# Altium PCB DUTBoard_NO_CAPS_2.PcbDoc (part 4 of 5)
Units mil, origin at the board's own origin, x right, y up, seen from the top; angles counter-clockwise.
Board outline 5475 x 5475 mil, 4 copper layers (Top Layer, Mid-Layer 1, Mid-Layer 2, Bottom Layer); 57 components, 471 nets, 1641 pads, 1025 vias.
Unrouted connection lines stored in the file: 1.
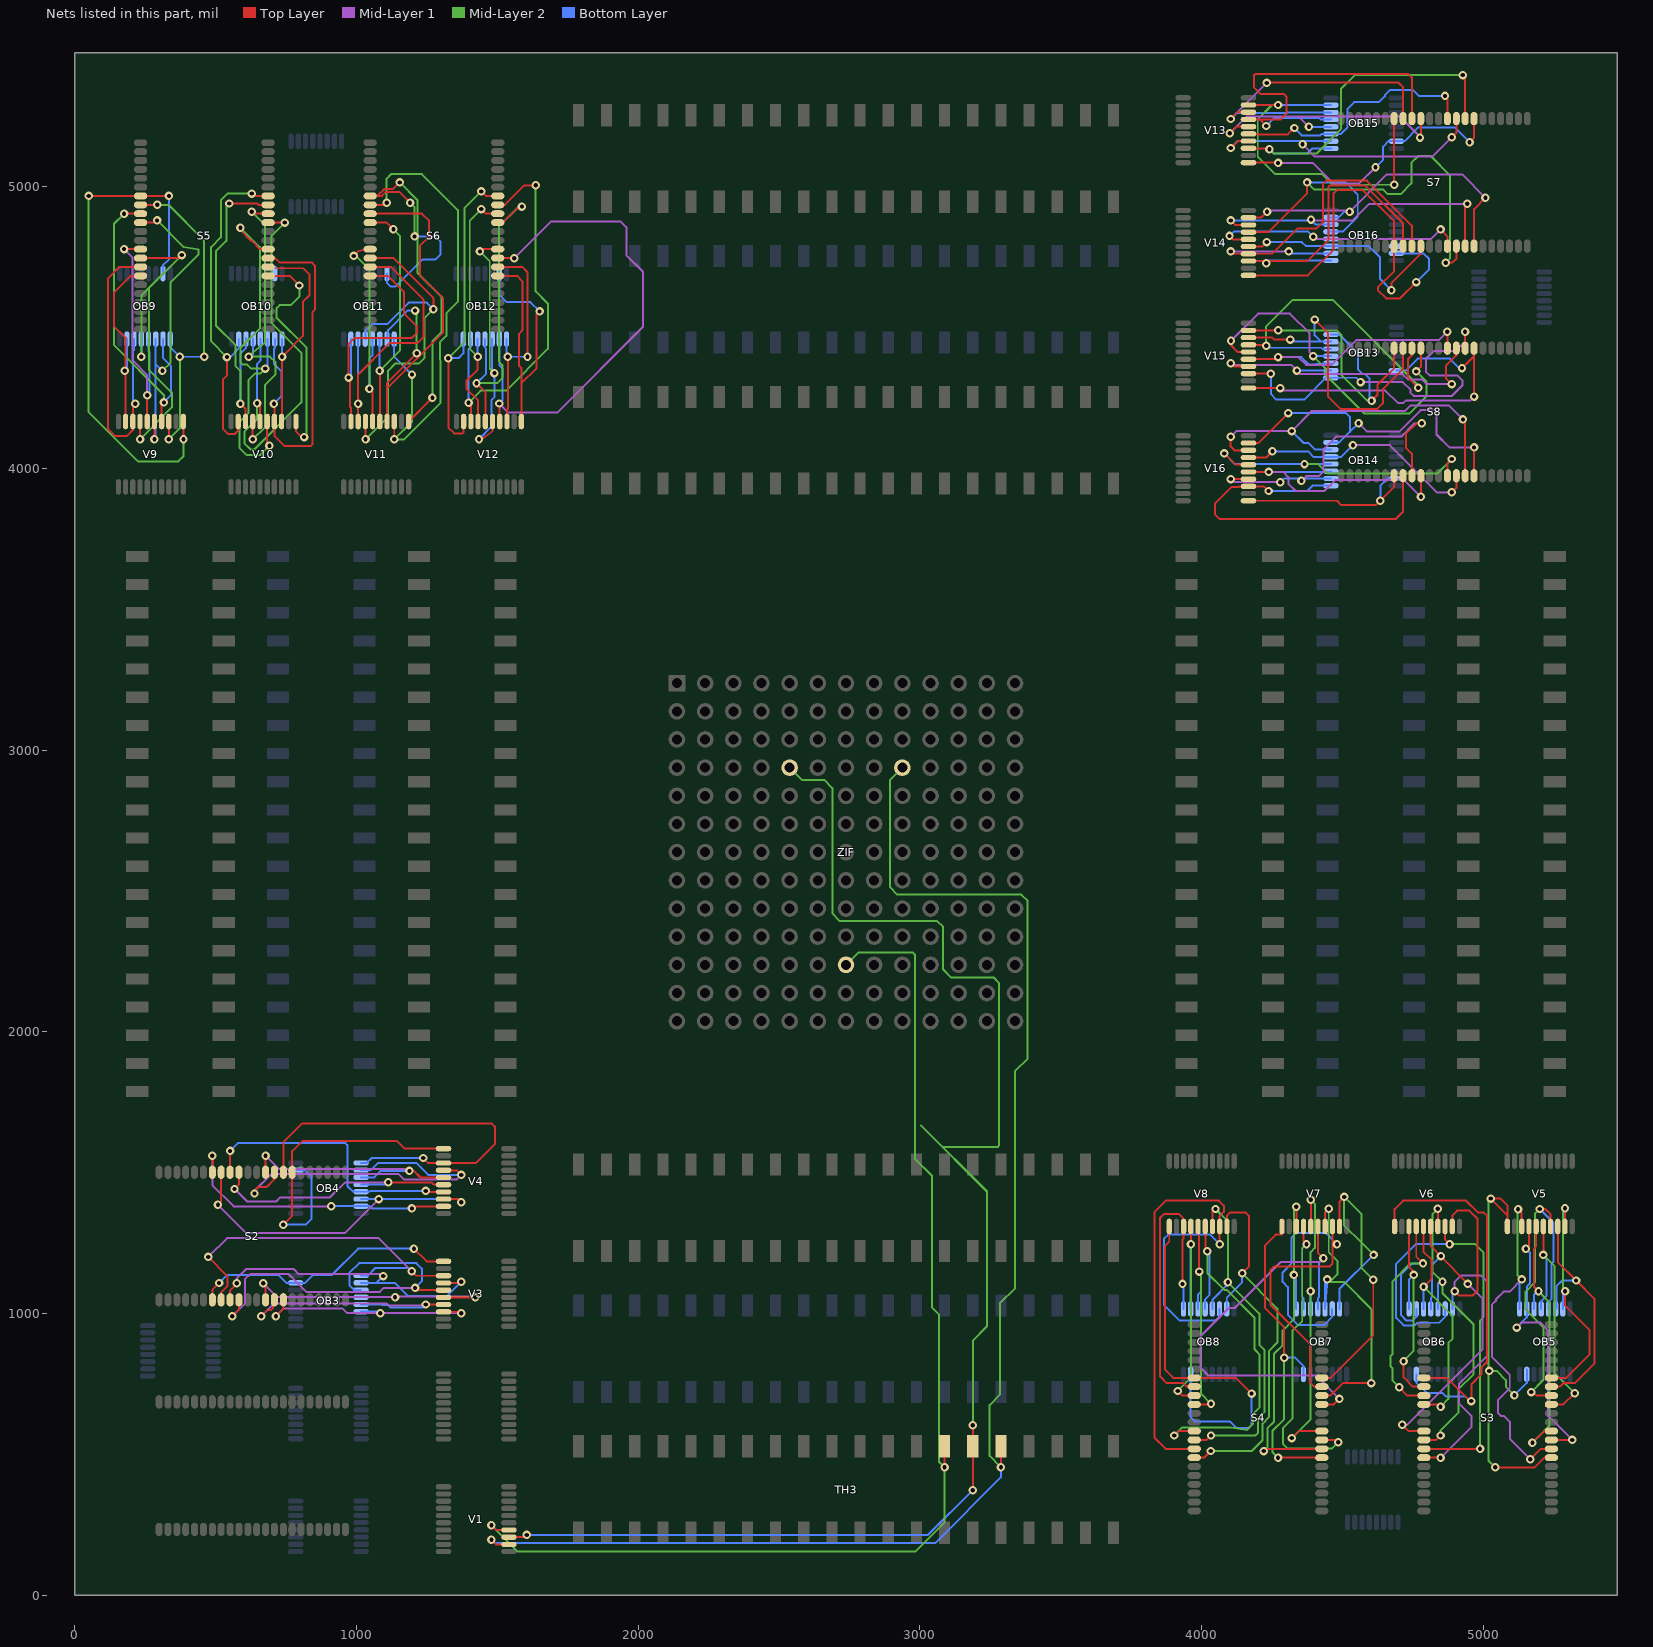
[diagram p6: the nets of this part, all layers, seen from the top]

## Via types
v1: diameter 30, hole 15, Top Layer to Bottom Layer, 1025 vias

## Nets (pads, with @x,y where several pads share a name; then routed paths per layer and width w, separated by ;. In a path a pad name is that pad's centre, name@x,y a point inside that pad or via, vN(x,y) a via of type N, cw(c..) or ccw(c..) an arc to the next point about the centre after c; other vN are vias at no path point) (continued)
INSIDE_B125: TH3.27@3087.5,528.54 V1.IVCC5 ZIF.126 | length 4157.8
  Top Layer w7: v1(1479,248) 1495.39,231.61 V1.IVCC5@1541.14,231.61 ; v1(3087.5,454.17) TH3.27@3087.5,528.54
  Mid-Layer 2 w7: v1(1479,248) 1571,156 2985,156 3087.5,258.5 v1(3087.5,454.17) 3067,474.67 3067,997 3043,1021 3043,1488 2982,1549 2982,2274 2974,2282 2782,2282 ZIF.126@2737.5,2237.5
INSIDE_B126: TH3.26@3187.5,528.54 V1.IVCC6 ZIF.127 | length 5316.4
  Top Layer w7: V1.IVCC6@1541.14,206.02 1596.02,206.02 v1(1604,214) ; v1(3187.5,373) TH3.26@3187.5,528.54 v1(3187.5,603)
  Mid-Layer 2 w7: ZIF.127@2537.5,2937.5 2581,2894 2660,2894 2689,2865 2689,2420 2716,2393 3061,2393 3082,2372 3082,2221 3110,2193 3261,2193 3281,2173 3281,1596.5 3275.5,1591 3080,1591 ; 3004,1667 3238,1433 3238,954 3187.5,903.5 v1(3187.5,603)
  Bottom Layer w7: v1(1604,214) 3028.5,214 v1(3187.5,373)
INSIDE_B127: TH3.25@3287.5,528.54 V1.IVCC7 ZIF.128 | length 5124
  Top Layer w7: v1(1479,197) 1495.57,180.43 V1.IVCC7@1541.14,180.43 ; v1(3287.5,454.17) TH3.25@3287.5,528.54
  Mid-Layer 2 w7: ZIF.128@2937.5,2937.5 2893,2893 2893,2514 2920,2487 3360,2487 3382,2465 3382,1905 3338,1861 3338,1090 3284,1036 3284,711.56 3247,674.56 3247,494.67 v1(3287.5,454.17)
  Bottom Layer w7: v1(1479,197) 1491,185 3054,185 3287.5,418.5 v1(3287.5,454.17)
NetOB1_U_OB_WRP16_DS: OB16.DS
OB_D_B0: OB16.D0 S7.DATA0 V14.OVL0 | length 1471.6
  Top Layer w7: V14.OVL0@4166.14,4684.84 4376.84,4684.84 4468,4776 4468,4976.5 4479,4987.5 4572.22,4987.5 4683.27,4876.45 S7.DATA0@4683.27,4788.62 4683.27,4699.6 4625.57,4641.9 4625.57,4632 4654.57,4603 4704,4603 v1(4762,4661)
  Bottom Layer w7: OB16.D0@4691.14,4763.02 4786.98,4763.02 4807,4743 4807,4706 v1(4762,4661)
OB_D_B1: OB16.D1 S7.DATA1 V14.OVL1 | length 1149.3
  Top Layer w7: V14.OVL1@4166.14,4736.02 v1@4229.5,4736.02 ; v1(4229.5,4727.5) v1@4229.5,4736.02 ; S7.DATA1@4714.76,4788.62 4714.76,4869 4579.26,5004.5 4455,5004.5 4450,4999.5 4450,4810 4376.02,4736.02 v1@4229.5,4736.02
  Bottom Layer w7: v1(4229.5,4727.5) 4239.43,4737.43 OB16.D1@4458.86,4737.43
OB_D_B2: OB16.D2 S7.DATA2 V14.OVL2 | length 1330.8
  Top Layer w7: v1(4103,4770) 4111.39,4761.61 V14.OVL2@4166.14,4761.61 4250.61,4761.61 4340,4851 4406,4851 4430.71,4875.71 4430.71,5009.5 4442.71,5021.5 4586.5,5021.5 4746.26,4861.74 S7.DATA2@4746.26,4788.62
  Mid-Layer 1 w7: v1(4103,4770) v1(4309,4770)
  Bottom Layer w7: v1(4309,4770) 4315.98,4763.02 OB16.D2@4458.86,4763.02
OB_D_B3: OB16.D3 S7.DATA3 V14.OVL3 | length 828.9
  Top Layer w7: V14.OVL3@4166.14,4787.2 4215,4787.2 v1(4231,4803.2) ; v1(4673.4,4632.15) 4673.4,4657.15 4777.76,4761.5 S7.DATA3@4777.76,4788.62
  Bottom Layer w7: v1(4231,4803.2) 4355.8,4803.2 4370.39,4788.61 OB16.D3@4458.86,4788.61 4592.9,4788.61 4633,4748.51 4633,4672.55 v1(4673.4,4632.15)
OB_D_B4: OB16.D4 S7.DATA4 V14.OVL4 | length 988.6
  Top Layer w7: v1(4098.77,4825) 4110.97,4812.8 V14.OVL4@4166.14,4812.8 ; v1(4848,4848) 4872.24,4823.76 S7.DATA4@4872.24,4788.62
  Mid-Layer 1 w7: v1(4396,4822.2) 4404,4814.2 4814.2,4814.2 v1(4848,4848)
  Bottom Layer w7: v1(4098.77,4825) 4114.27,4840.5 4377.7,4840.5 v1(4396,4822.2) 4404,4814.2 OB16.D4@4458.86,4814.2
OB_D_B5: OB16.D5 S7.DATA5 V14.OVL5 | length 1754.7
  Top Layer w7: V14.OVL5@4166.14,4838.39 4236.02,4838.39 4374,4976.37 v1(4374,5015) ; v1(4866,4730) 4890,4730 4903.74,4743.74 S7.DATA5@4903.74,4788.62
  Mid-Layer 2 w7: v1(4374,5015) 4400,4989 4644.57,4989 4660.27,4973.31 4706,4973.31 4744.07,5011.37 4744.07,5084.63 4768,5108.57 4812.43,5108.57 4882,5039 4882,4746 v1(4866,4730)
  Bottom Layer w7: v1(4374,5015) 4510.67,5015 4554,4971.67 4554,4892.5 4501.3,4839.8 OB16.D5@4458.86,4839.8
OB_D_B6: OB16.D6 S7.DATA6 V14.OVL6 | length 1169
  Top Layer w7: v1(4103,4880) 4119.02,4863.98 V14.OVL6@4166.14,4863.98 ; S7.DATA6@4935.24,4788.62 4935.24,4931.24 v1(4943,4939)
  Mid-Layer 1 w7: v1(4388,4883) 4392,4879 4535.21,4879 4595.21,4939 v1(4943,4939)
  Bottom Layer w7: v1(4103,4880) v1@4388,4880 ; v1(4388,4883) v1@4388,4880 ; OB16.D6@4458.86,4865.39 4405.61,4865.39 v1@4388,4880
OB_D_B7: OB16.D7 S7.DATA7 V14.OVL7 | length 1207.8
  Top Layer w7: V14.OVL7@4166.14,4889.57 4210.57,4889.57 v1(4232,4911) ; S7.DATA7@4966.73,4788.62 4966.73,4920.23 v1(5007,4960.5)
  Mid-Layer 1 w7: v1(4232,4911) 4236.5,4915.5 v1@4524.87,4915.5 ; v1(4524.87,4911) 4656.87,5043 4924.5,5043 v1(5007,4960.5)
  Bottom Layer w7: OB16.D7@4458.86,4890.98 4486.57,4890.98 4506.6,4911 v1(4524.87,4911) v1@4524.87,4915.5
OB_D_B8: OB15.D0 S7.DATA8 V13.OVL0 | length 1036.9
  Top Layer w7: V13.OVL0@4166.14,5084.84 4270.16,5084.84 v1(4271,5084) ; v1(4951,5157.73) 4966.73,5173.46 S7.DATA8@4966.73,5241.38
  Mid-Layer 1 w7: v1(4271,5084) 4394,5084 4466.81,5011.19 4559.19,5011.19 v1(4617,5069)
  Bottom Layer w7: v1(4617,5069) 4644,5096 4644,5142 4663.02,5161.02 OB15.D0@4691.14,5161.02 4720,5161.02 4769.48,5210.5 4898.23,5210.5 v1(4951,5157.73)
OB_D_B9: OB15.D1 S7.DATA9 V13.OVL1 | length 1357.4
  Top Layer w7: V13.OVL1@4166.14,5136.02 4236.98,5136.02 v1(4240.48,5132.52) ; v1(4927,5396) 4935.24,5387.76 S7.DATA9@4935.24,5241.38
  Mid-Layer 2 w7: v1(4240.48,5132.52) 4255.5,5117.5 4407.89,5117.5 4494.44,5204.06 4494.44,5346.44 4544,5396 v1(4927,5396)
  Bottom Layer w7: v1(4240.48,5132.52) 4255.5,5117.5 4375.48,5117.5 4393.41,5135.43 OB15.D1@4458.86,5135.43
OB_D_B10: OB15.D2 S7.DATA10 V13.OVL2 | length 1104.3
  Top Layer w7: v1(4103,5137) 4127.61,5161.61 V13.OVL2@4166.14,5161.61 ; v1(4887.74,5175) 4903.74,5191 S7.DATA10@4903.74,5241.38
  Mid-Layer 1 w7: v1(4358,5150) 4402,5106 4818.74,5106 v1(4887.74,5175)
  Bottom Layer w7: v1(4103,5137) 4127.02,5161.02 4369.02,5161.02 ; v1(4358,5150) 4369.02,5161.02 ; OB15.D2@4458.86,5161.02 4369.02,5161.02
OB_D_B11: OB15.D3 S7.DATA11 V13.OVL3 | length 918.9
  Top Layer w7: V13.OVL3@4166.14,5187.2 4198.88,5187.2 4201.09,5185 4306,5185 v1(4329,5208) ; v1(4863.65,5322) 4872.24,5313.4 S7.DATA11@4872.24,5241.38
  Bottom Layer w7: v1(4329,5208) 4355,5182 4421.39,5182 4426,5186.61 OB15.D3@4458.86,5186.61 4494.5,5186.61 4494.5,5186.85 4518.25,5210.6 4518.25,5276.25 4541.49,5299.49 4629.07,5299.49 4650.08,5320.5 4650.08,5324.03 4669.05,5343 4749.56,5343 4770.56,5322 v1(4863.65,5322)
OB_D_B12: OB15.D4 S7.DATA12 V13.OVL4 | length 1005.1
  Top Layer w7: v1(4100,5189) 4123.8,5212.8 V13.OVL4@4166.14,5212.8 ; v1(4775,5174) 4777.76,5176.76 S7.DATA12@4777.76,5241.38
  Mid-Layer 1 w7: v1(4100,5189) 4159,5248 4345,5248 ; v1(4380.8,5212.2) 4345,5248 ; v1(4775,5174) 4775,5177 4704,5248 4345,5248
  Bottom Layer w7: v1(4380.8,5212.2) OB15.D4@4458.86,5212.2
OB_D_B13: OB15.D5 S7.DATA13 V13.OVL5 | length 1367.5
  Top Layer w7: V13.OVL5@4166.14,5238.39 4205.61,5238.39 ; v1(4229,5215) 4205.61,5238.39 ; S7.DATA13@4746.26,5241.38 4746.26,5386.74 4733,5400 4190,5400 4186,5396 4186,5351 4208,5329 4291,5329 4301,5319 4301,5258 4281.39,5238.39 4205.61,5238.39
  Bottom Layer w7: v1(4229,5215) 4258,5244 4417,5244 4423.2,5237.8 OB15.D5@4458.86,5237.8
OB_D_B14: OB15.D6 S7.DATA14 V13.OVL6 | length 1221.9
  Top Layer w7: v1(4103,5240) 4126.98,5263.98 V13.OVL6@4166.14,5263.98 ; v1(4231,5368) 4232.5,5369.5 4697.26,5369.5 4714.76,5352 S7.DATA14@4714.76,5241.38
  Mid-Layer 1 w7: v1(4103,5240) v1(4231,5368)
  Bottom Layer w7: v1(4103,5240) 4124.07,5261.07 4299.5,5261.07 4301.82,5263.39 OB15.D6@4458.86,5263.39
OB_D_B15: OB15.D7 S7.DATA15 V13.OVL7 | length 1279.3
  Top Layer w7: V13.OVL7@4166.14,5289.57 v1(4271,5289.57) ; v1(4683.27,5006.5) S7.DATA15@4683.27,5241.38
  Mid-Layer 2 w7: v1(4271,5289.57) 4249.57,5289.57 4199,5239 4199,5106 4260,5045 4426,5045 4464.5,5006.5 v1(4683.27,5006.5)
  Bottom Layer w7: v1(4271,5289.57) 4271.59,5288.98 OB15.D7@4458.86,5288.98
OB_D_B16: OB14.D0 S8.DATA0 V16.OVL0 | length 711.3
  Top Layer w7: V16.OVL0@4166.14,3884.84 4480.29,3884.84 4496.13,3869 4618.16,3869 v1(4634,3884.84) 4683.27,3934.11 S8.DATA0@4683.27,3973.62
  Bottom Layer w7: v1(4634,3884.84) 4634,3938.02 4660,3964.02 OB14.D0@4691.14,3964.02
OB_D_B17: OB14.D1 S8.DATA1 V16.OVL1 | length 1301.7
  Top Layer w7: v1(4237.5,3919.52) 4221,3936.02 V16.OVL1@4166.14,3936.02 4134.02,3936.02 4131,3933 4105,3933 4048,3876 4048,3836 4064,3820 4688,3820 4714.76,3846.76 S8.DATA1@4714.76,3973.62
  Bottom Layer w7: v1(4237.5,3919.52) 4374.48,3919.52 4393.39,3938.43 OB14.D1@4458.86,3938.43
OB_D_B18: OB14.D2 S8.DATA2 V16.OVL2 | length 1227
  Top Layer w7: v1(4103,3962) 4103.39,3961.61 V16.OVL2@4166.14,3961.61 ; S8.DATA2@4746.26,3973.62 4746.26,4052.19 4725,4073.45 4725,4121.95 4763.05,4160 v1(4781,4160)
  Mid-Layer 1 w7: v1(4103,3962) 4114.3,3950.7 v1(4278.98,3950.7) ; v1(4353.98,3956.02) 4370.48,3972.52 4416,3972.52 4432.5,3989.02 4432.5,4067.5 4477.54,4112.54 4707.98,4112.54 4755.44,4160 v1(4781,4160)
  Bottom Layer w7: v1(4278.98,3950.7) 4292.3,3964.02 v1@4361.98,3964.02 ; v1(4353.98,3956.02) v1@4361.98,3964.02 ; OB14.D2@4458.86,3964.02 v1@4361.98,3964.02
OB_D_B19: OB14.D3 S8.DATA3 V16.OVL3 | length 991.4
  Top Layer w7: V16.OVL3@4166.14,3987.2 v1(4237.8,3987.2) ; S8.DATA3@4777.76,3973.62 4777.76,3899.24 v1(4778,3899)
  Mid-Layer 1 w7: v1(4237.8,3987.2) 4289.8,3987.2 4308,3969 4308,3945 4333,3920 4436,3920 4474,3958 4719,3958 v1(4778,3899)
  Bottom Layer w7: v1(4237.8,3987.2) 4237.8,3987 4238.3,3986.5 4430.81,3986.5 4431.18,3986.87 4456.12,3986.87 OB14.D3@4458.86,3989.61
OB_D_B20: OB14.D4 S8.DATA4 V16.OVL4 | length 1170
  Top Layer w7: v1(4080,4053) 4120.2,4012.8 V16.OVL4@4166.14,4012.8 ; S8.DATA4@4872.24,3973.62 4872.24,4017.24 v1(4888,4033)
  Mid-Layer 2 w7: v1(4365,4015) 4413,4015 4446,3982 4837,3982 v1(4888,4033)
  Bottom Layer w7: v1(4080,4053) 4117.8,4015.2 4225.49,4015.2 4225.99,4015.7 4249.6,4015.7 4250.1,4015.2 4351.63,4015.2 4352.43,4016 4412,4016 4412.8,4015.2 ; v1(4365,4015) 4412.59,4015 4412.8,4015.2 ; OB14.D4@4458.86,4015.2 4412.8,4015.2
OB_D_B21: OB14.D5 S8.DATA5 V16.OVL5 | length 891.2
  Top Layer w7: V16.OVL5@4166.14,4038.39 4229,4038.39 v1(4251.11,4060.5) ; v1(4888,3915) 4903.74,3930.74 S8.DATA5@4903.74,3973.62
  Mid-Layer 1 w7: v1(4537,4082) 4668,4082 4835,3915 v1(4888,3915)
  Bottom Layer w7: v1(4251.11,4060.5) 4377.5,4060.5 4398,4040 4458.06,4040 OB14.D5@4458.86,4040.8 4495.8,4040.8 v1(4537,4082)
OB_D_B22: OB14.D6 S8.DATA6 V16.OVL6 | length 1364.4
  Top Layer w7: v1(4103,4112) 4103,4077.48 4116.5,4063.98 V16.OVL6@4166.14,4063.98 ; v1(4927.24,4173.76) 4935.24,4165.76 S8.DATA6@4935.24,3973.62
  Mid-Layer 1 w7: v1(4103,4112) 4123,4132 v1(4319.39,4132) 4391.58,4204.19 4722.19,4204.19 4741.5,4223.5 4877.5,4223.5 v1(4927.24,4173.76)
  Bottom Layer w7: v1(4319.39,4132) 4361.39,4090 4379,4090 4402.61,4066.39 OB14.D6@4458.86,4066.39
OB_D_B23: OB14.D7 S8.DATA7 V16.OVL7 | length 1247.4
  Top Layer w7: V16.OVL7@4166.14,4089.57 4200.5,4089.57 v1(4306.93,4196) ; S8.DATA7@4966.73,3973.62 v1(4966.73,4074)
  Mid-Layer 1 w7: v1(4557,4160) 4587,4130 4701,4130 4777.5,4206.5 4830,4206.5 4833.5,4203 4833.5,4120 4879.5,4074 v1(4966.73,4074)
  Bottom Layer w7: v1(4306.93,4196) 4513,4196 4526,4183 4526,4129 ; OB14.D7@4458.86,4091.98 4488.98,4091.98 4526,4129 ; v1(4557,4160) 4526,4129
OB_D_B24: OB13.D0 S8.DATA8 V15.OVL0 | length 1328
  Top Layer w7: V15.OVL0@4166.14,4284.84 v1(4279,4284.84) ; v1(4924,4356) 4966.73,4398.73 ; v1(4966.73,4254.5) 4966.73,4398.73 ; S8.DATA8@4966.73,4426.38 4966.73,4398.73
  Mid-Layer 1 w7: v1(4279,4284.84) 4287.84,4276 4652,4276 4696,4232 4716,4232 4724.5,4240.5 4952.73,4240.5 v1(4966.73,4254.5)
  Bottom Layer w7: OB13.D0@4691.14,4347.02 4724.41,4347.02 4766.39,4389 4881,4389 4914,4356 v1(4924,4356)
OB_D_B25: OB13.D1 S8.DATA9 V15.OVL1 | length 1381.7
  Top Layer w7: V15.OVL1@4166.14,4336.02 v1(4245.43,4336.02) ; v1(4935,4485) 4935.24,4484.76 S8.DATA9@4935.24,4426.38
  Mid-Layer 1 w7: v1(4564,4306) 4714.5,4306 4740.5,4280 4740.5,4269 4752,4257.5 4888.5,4257.5 4925,4294 4925,4312 4907,4330 4809.26,4330 4796,4343.26 4796,4388.01 4824.99,4417 4901,4417 4935,4451 v1(4935,4485)
  Bottom Layer w7: v1(4245.43,4336.02) 4245.43,4264 4265.37,4244.07 4363.63,4244.07 4441,4321.43 OB13.D1@4458.86,4321.43 4548.57,4321.43 v1(4564,4306)
OB_D_B26: OB13.D2 S8.DATA10 V15.OVL2 | length 1155.7
  Top Layer w7: v1(4103,4373) 4114.39,4361.61 V15.OVL2@4166.14,4361.61 ; v1(4887.74,4299) 4866.5,4320.24 4866.5,4363.5 4903.74,4400.74 S8.DATA10@4903.74,4426.38
  Mid-Layer 1 w7: v1(4103,4373) 4110,4366 4319,4366 v1(4337.98,4347.02) 4350.5,4334.5 4714.5,4334.5 4734,4315 4783.26,4315 4799.26,4299 v1(4887.74,4299)
  Bottom Layer w7: v1(4337.98,4347.02) OB13.D2@4458.86,4347.02
OB_D_B27: OB13.D3 S8.DATA11 V15.OVL3 | length 1027.5
  Top Layer w7: V15.OVL3@4166.14,4387.2 4263.2,4387.2 v1(4271,4395) ; v1(4872,4485) 4872.24,4484.76 S8.DATA11@4872.24,4426.38
  Mid-Layer 1 w7: v1(4271,4395) 4343,4395 4371,4367 4461,4367 4550,4456 4843,4456 v1(4872,4485)
  Bottom Layer w7: v1(4271,4395) 4354,4395 4381,4368 4429.61,4372.61 OB13.D3@4458.86,4372.61
OB_D_B28: OB13.D4 S8.DATA12 V15.OVL4 | length 1302.2
  Top Layer w7: v1(4104,4453) 4104,4437 4128.2,4412.8 V15.OVL4@4166.14,4412.8 ; v1(4762,4344) 4777.76,4359.76 S8.DATA12@4777.76,4426.38
  Mid-Layer 1 w7: v1(4104,4453) 4200,4549 4313,4549 4383,4479 4383,4411.5 v1(4396.3,4398.2)
  Mid-Layer 2 w7: v1(4396.3,4398.2) 4439,4355.5 4439,4333 4578,4194 4736.75,4194 4798,4255.25 4798,4308 v1(4762,4344)
  Bottom Layer w7: v1(4396.3,4398.2) OB13.D4@4458.86,4398.2
OB_D_B29: OB13.D5 S8.DATA13 V15.OVL5 | length 1241.4
  Top Layer w7: V15.OVL5@4166.14,4438.39 4225.61,4438.39 v1(4229,4435) ; S8.DATA13@4746.26,4426.38 4746.26,4401.26 4733,4388 4733,4322 v1(4769,4286)
  Mid-Layer 2 w7: v1(4229,4435) 4229,4504 4323,4598 4465,4598 4769,4294 v1(4769,4286)
  Bottom Layer w7: v1(4229,4435) 4236,4428 4425,4428 4429.2,4423.8 OB13.D5@4458.86,4423.8
OB_D_B30: OB13.D6 S8.DATA14 V15.OVL6 | length 1126.1
  Top Layer w7: V15.OVL6@4166.14,4463.98 4250.52,4463.98 4257.5,4457 v1(4314,4457) ; v1(4401,4528) 4448,4481 4448,4255 4492,4211 4623.5,4211 4643,4230.5 4643,4281 4714.76,4352.76 S8.DATA14@4714.76,4426.38
  Bottom Layer w7: v1(4314,4457) 4321.61,4449.39 4423.61,4449.39 ; v1(4401,4528) 4401,4472 4423.61,4449.39 ; OB13.D6@4458.86,4449.39 4423.61,4449.39
OB_D_B31: OB13.D7 S8.DATA15 V15.OVL7 | length 1161.9
  Top Layer w7: V15.OVL7@4166.14,4489.57 4271,4489.57 v1(4271.43,4490) ; v1(4603,4240) 4624.09,4261.09 4624.09,4296 4683.27,4355.18 S8.DATA15@4683.27,4426.38
  Mid-Layer 2 w7: v1(4271.43,4490) 4480,4490 4497,4473 4497,4330 4587,4240 v1(4603,4240)
  Bottom Layer w7: OB13.D7@4458.86,4474.98 4489.02,4474.98 4555,4409 4555,4375.31 4554.5,4374.81 4554.5,4351.2 4571.2,4334.5 4580,4334.5 4595,4319.5 4595,4248 v1(4603,4240)
OB_D_B32: OB12.D0 S6.DATA0 V12.OVL0 | length 1126.2
  Top Layer w7: S6.DATA0@1501.38,4683.27 1569.81,4683.27 1589.08,4664 1589.08,4489.36 1577,4477.28 1577,4364 1585.16,4355.84 1585.16,4302.16 ; V12.OVL0@1585.16,4166.14 1585.16,4302.16 ; v1(1650,4557) 1639,4546 1639,4356 1585.16,4302.16
  Bottom Layer w7: OB12.D0@1506.98,4691.14 1506.98,4616 1532.98,4590 1617,4590 v1(1650,4557)
OB_D_B33: OB12.D1 S6.DATA1 V12.OVL1 | length 779.2
  Top Layer w7: S6.DATA1@1501.38,4714.76 1588.24,4714.76 1607,4696 v1(1607,4396) ; V12.OVL1@1533.98,4166.14 1533.98,4208.02 1537,4211.05 v1(1537,4396)
  Bottom Layer w7: OB12.D1@1532.57,4458.86 1532.57,4400.43 v1(1537,4396) v1(1607,4396)
OB_D_B34: OB12.D2 S6.DATA2 V12.OVL2 | length 1848.9
  Top Layer w7: S6.DATA2@1501.38,4746.26 1559.74,4746.26 v1(1560,4746) ; v1(1506.98,4230.02) 1508.39,4228.61 V12.OVL2@1508.39,4166.14
  Mid-Layer 1 w7: v1(1506.98,4230.02) 1539,4198 1713,4198 2017,4502 2017,4698 1958,4757 1958,4856 1938,4876 1690,4876 v1(1560,4746)
  Bottom Layer w7: v1(1506.98,4230.02) 1518,4241.05 1518,4355.45 1506.98,4366.48 OB12.D2@1506.98,4458.86
OB_D_B35: OB12.D3 S6.DATA3 V12.OVL3 | length 992.4
  Top Layer w7: v1(1434.8,4103.58) 1444.24,4103.58 1482.8,4132.08 V12.OVL3@1482.8,4166.14 ; v1(1438,4769.76) 1446,4777.76 S6.DATA3@1501.38,4777.76
  Mid-Layer 2 w7: v1(1438,4769.76) 1473,4734.76 1473,4354.36 v1(1489.39,4337.98)
  Bottom Layer w7: v1(1434.8,4103.58) 1478,4146.79 1478,4159 1478.48,4159.48 1478.48,4241.83 1489.39,4252.74 v1(1489.39,4337.98) 1481.39,4345.98 OB12.D3@1481.39,4458.86
OB_D_B36: OB12.D4 S6.DATA4 V12.OVL4 | length 1185.9
  Top Layer w7: v1(1426,4302.2) 1457.2,4271 V12.OVL4@1457.2,4166.14 ; S6.DATA4@1501.38,4872.24 1520.24,4872.24 1520.24,4873.8 1575.44,4929 v1(1587,4929)
  Mid-Layer 2 w7: v1(1426,4302.2) 1499.96,4302.2 1518,4320.25 1518,4366.36 1505,4379.36 1505,4858.56 1575.44,4929 v1(1587,4929)
  Bottom Layer w7: v1(1426,4302.2) 1460,4336.2 1460,4425 1455.8,4429.2 OB12.D4@1455.8,4458.86
OB_D_B37: OB12.D5 S6.DATA5 V12.OVL5 | length 944.1
  Top Layer w7: v1(1430.2,4396.3) 1430.2,4350.2 1390,4310 1390,4283 1431.61,4241.39 V12.OVL5@1431.61,4166.14 ; v1(1443,4920) 1459.26,4903.74 S6.DATA5@1501.38,4903.74
  Mid-Layer 2 w7: v1(1430.2,4396.3) 1402,4424.5 1402,4879 v1(1443,4920)
  Bottom Layer w7: v1(1430.2,4396.3) OB12.D5@1430.2,4458.86
OB_D_B38: OB12.D6 S6.DATA6 V12.OVL6 | length 1421.3
  Top Layer w7: v1(1398,4233.02) 1406.02,4225 V12.OVL6@1406.02,4166.14 ; S6.DATA6@1501.38,4935.24 1526.74,4935.24 1596,5004.5 v1(1636,5004.5)
  Mid-Layer 2 w7: v1(1398,4233.02) 1440.98,4276 1531,4276 1679,4424 1679,4585 1636,4628 v1(1636,5004.5)
  Bottom Layer w7: v1(1398,4233.02) 1397,4234.02 1397,4422 1404.61,4429.61 OB12.D6@1404.61,4458.86
OB_D_B39: OB12.D7 S6.DATA7 V12.OVL7 | length 1165.5
  Top Layer w7: v1(1326,4391) 1326,4144.46 1346.46,4124 1376,4124 1380.43,4128.43 V12.OVL7@1380.43,4166.14 ; v1(1443,4983) 1459.27,4966.73 S6.DATA7@1501.38,4966.73
  Mid-Layer 2 w7: v1(1326,4391) 1383,4448 1383,4923 v1(1443,4983)
  Bottom Layer w7: v1(1326,4391) 1362.02,4391 1379.02,4408 OB12.D7@1379.02,4458.86
OB_D_B40: OB11.D0 S6.DATA8 V11.OVL0 | length 1766.9
  Top Layer w7: S6.DATA8@1048.62,4966.73 1073.74,4966.73 ; v1(1153.27,5014.73) 1129.27,4990.73 1097.74,4990.73 1073.74,4966.73 ; V11.OVL0@1185.16,4166.14 v1(1269.5,4250.48) ; v1(1190,4943) 1153,4980 1103.27,4980 1090,4966.73 1073.74,4966.73
  Mid-Layer 2 w7: v1(1153.27,5014.73) 1216.5,4951.5 1216.5,4694.5 1301.5,4609.5 1301.5,4483 1269.5,4451 v1(1269.5,4250.48) ; v1(1190,4943) 1206,4927 v1(1206,4823)
  Bottom Layer w7: OB11.D0@1107.98,4691.14 1107.98,4658.02 1120,4646 1138.95,4646 1233.95,4741 1279.5,4741 1298.5,4760 1298.5,4804.5 1280,4823 v1(1206,4823)
OB_D_B41: OB11.D1 S6.DATA9 V11.OVL1 | length 1867.2
  Top Layer w7: S6.DATA9@1048.62,4935.24 1099.24,4935.24 v1(1107,4943) ; V11.OVL1@1133.98,4166.14 v1@1133.98,4111.02 ; v1@1133.98,4111.02 v1(1134,4103) v1@1134,4111
  Mid-Layer 2 w7: v1(1107,4943) 1107,5028.5 1122.5,5044 1232,5044 1359.81,4916.19 1359.81,4592 1319,4551.19 1319,4470 1296,4447 1299,4320 1299,4233 1169,4103 v1(1134,4103) 1197,4166 v1(1197,4332.57)
  Bottom Layer w7: OB11.D1@1133.57,4458.86 1133.57,4396 v1(1197,4332.57)
OB_D_B42: OB11.D2 S6.DATA10 V11.OVL2 | length 1539.7
  Top Layer w7: S6.DATA10@1048.62,4903.74 1232,4903.74 1257.5,4878.24 1257.5,4822.5 1225,4790 1225,4686 1307.5,4603.5 1307.5,4483.5 1108.39,4284.39 ; V11.OVL2@1108.39,4166.14 1108.39,4284.39 ; v1(1213.5,4408.11) 1108.39,4303 1108.39,4284.39
  Mid-Layer 2 w7: v1(1208,4559.78) 1213.5,4554.28 v1(1213.5,4408.11)
  Bottom Layer w7: OB11.D2@1107.98,4458.86 1112,4490.84 1180.94,4559.78 v1(1208,4559.78)
OB_D_B43: OB11.D3 S6.DATA11 V11.OVL3 | length 927.9
  Top Layer w7: S6.DATA11@1048.62,4872.24 1107,4872.24 v1(1131,4848.24) ; v1(1082,4346) 1082.8,4345.2 V11.OVL3@1082.8,4166.14
  Mid-Layer 2 w7: v1(1082,4346) 1155,4419 1155,4824.24 v1(1131,4848.24)
  Bottom Layer w7: v1(1082,4346) 1082.39,4346.39 OB11.D3@1082.39,4458.86
OB_D_B44: OB11.D4 S6.DATA12 V11.OVL4 | length 867.9
  Top Layer w7: v1(990,4753.76) 1007.74,4771.5 1035.5,4777.76 S6.DATA12@1048.62,4777.76 ; v1(1045.89,4282.32) 1057.2,4271 V11.OVL4@1057.2,4166.14
  Mid-Layer 2 w7: v1(990,4753.76) 998,4753.76 1045.89,4705.87 v1(1045.89,4282.32)
  Bottom Layer w7: v1(1045.89,4282.32) 1045.89,4390.48 1056.8,4401.39 OB11.D4@1056.8,4458.86
OB_D_B45: OB11.D5 S6.DATA13 V11.OVL5 | length 1319.2
  Top Layer w7: V11.OVL5@1031.61,4166.14 1031.61,4104.16 v1(1032.39,4103.39) ; S6.DATA13@1048.62,4746.26 1131.74,4746.26 1273,4605 v1(1273,4565)
  Mid-Layer 2 w7: v1(1032.39,4103.39) 1112,4183 1112,4347 1136.61,4371.61 1221.61,4371.61 1242,4392 1242,4534 v1(1273,4565)
  Bottom Layer w7: OB11.D5@1031.2,4458.86 1031.2,4488 1055.2,4512 1109.12,4512 1185.4,4588.28 1249.72,4588.28 v1(1273,4565)
OB_D_B46: OB11.D6 S6.DATA14 V11.OVL6 | length 1053.2
  Top Layer w7: v1(1005.61,4229.39) v1@1006.02,4228.98 ; V11.OVL6@1006.02,4166.14 v1@1006.02,4228.98 ; S6.DATA14@1048.62,4714.76 1122.24,4714.76 1237,4600 1237,4465.5 1215.5,4444 1117,4444 1006.02,4333.02 v1@1006.02,4228.98
  Bottom Layer w7: v1(1005.61,4229.39) OB11.D6@1005.61,4458.86
OB_D_B47: OB11.D7 S6.DATA15 V11.OVL7 | length 999.1
  Top Layer w7: V11.OVL7@980.43,4166.14 980.43,4214.26 977.11,4217.58 977.11,4316.89 v1(972,4322) 972,4442 993,4463 1197,4463 1215,4481 1215,4503 1168,4550 1168,4626.27 1111,4683.27 S6.DATA15@1048.62,4683.27
  Bottom Layer w7: v1(972,4322) v1@980.02,4330.02 ; v1@976,4318 976.8,4320.39 v1@980.02,4330.02 ; OB11.D7@980.02,4458.86 v1@980.02,4330.02
OB_D_B48: OB10.D0 S5.DATA0 V10.OVL0 | length 852.6
  Top Layer w7: S5.DATA0@686.38,4683.27 762.73,4683.27 v1(797,4649) ; V10.OVL0@785.16,4166.14 785.16,4131.84 806,4111 v1(814,4111)
  Mid-Layer 2 w7: v1(797,4649) 797,4609 767,4579 727.5,4579 716,4567.5 716,4535 822,4429 822,4119 v1(814,4111)
  Bottom Layer w7: v1@787,4659 v1(797,4649)
OB_D_B49: OB10.D1 S5.DATA1 V10.OVL1 | length 781.4
  Top Layer w7: S5.DATA1@686.38,4714.76 722.09,4710.17 810.5,4710.17 833.5,4687.17 833.5,4615.22 810,4591.72 810,4470 v1(736,4396) 736,4208.02 V10.OVL1@733.98,4166.14
  Bottom Layer w7: OB10.D1@735.57,4458.86 735.57,4404.43 736,4404 v1(736,4396)
OB_D_B50: OB10.D2 S5.DATA2 V10.OVL2 | length 1333.6
  Top Layer w7: S5.DATA2@686.38,4746.26 711.24,4746.26 726.5,4731 840.5,4731 852,4719.5 852,4562.98 843,4553.98 843,4085 836.95,4078.95 745.44,4078.95 708.39,4116 V10.OVL2@708.39,4166.14 708.39,4227.61 v1(707,4229)
  Bottom Layer w7: v1(707,4229) 733,4255 733,4345.22 707,4371.22 707,4424 709.98,4426.98 OB10.D2@709.98,4458.86
OB_D_B51: OB10.D3 S5.DATA3 V10.OVL3 | length 1427
  Top Layer w7: v1(588,4854) 588,4846 625.5,4808.5 628.81,4808.5 645.5,4791.81 645.5,4788.5 656.24,4777.76 S5.DATA3@686.38,4777.76 ; V10.OVL3@682.8,4166.14 682.8,4088.2 v1(691,4080)
  Mid-Layer 2 w7: v1(588,4854) 657,4785 657,4496.02 588,4427.02 588,4376.7 596.91,4367.8 612.2,4367.8 626.02,4353.98 v1(676.39,4353.98) 659.41,4337 640,4337 617,4314 617,4198 585,4166 585,4072 609,4048 659,4048 v1(691,4080)
  Bottom Layer w7: v1(676.39,4353.98) 684.39,4361.98 OB10.D3@684.39,4458.86
OB_D_B52: OB10.D4 S5.DATA4 V10.OVL4 | length 1501.5
  Top Layer w7: v1(647,4231) 657.2,4220.8 V10.OVL4@657.2,4166.14 ; S5.DATA4@686.38,4872.24 v1(745,4872.24)
  Mid-Layer 2 w7: v1(647,4231) 647,4175 603,4131 603,4087.87 624,4066.87 636.87,4066.87 804,4234 804,4410 699,4515 699,4826.24 v1(745,4872.24)
  Bottom Layer w7: v1(647,4231) 647,4370.68 658.8,4382.48 OB10.D4@658.8,4458.86
OB_D_B53: OB10.D5 S5.DATA5 V10.OVL5 | length 1168.6
  Top Layer w7: v1(628,4911) 635.26,4903.74 S5.DATA5@686.38,4903.74 ; V10.OVL5@631.61,4166.14 631.61,4103.39 v1(632,4103)
  Mid-Layer 2 w7: v1(628,4911) 675,4864 675,4446.1 625.2,4404.3 v1(617.2,4396.3) 692.7,4396.3 713,4376 713,4333.5 675.5,4296 675.5,4146.5 v1(632,4103)
  Bottom Layer w7: v1(617.2,4396.3) 633.2,4404.3 OB10.D5@633.2,4458.86
OB_D_B54: OB10.D6 S5.DATA6 V10.OVL6 | length 1219.5
  Top Layer w7: v1(548,4940) 647.99,4940 652.76,4935.24 S5.DATA6@686.38,4935.24 ; v1(588,4229) 606.02,4210.98 V10.OVL6@606.02,4166.14
  Mid-Layer 2 w7: v1(548,4940) 538,4930 538,4807.68 501,4770.68 501,4507 570,4438 570,4364.7 588,4346.7 v1(588,4229)
  Bottom Layer w7: v1(588,4229) 588,4405.19 588.7,4405.89 588.7,4408.1 608,4427.4 OB10.D6@608,4463
OB_D_B55: OB10.D7 S5.DATA7 V10.OVL7 | length 1224
  Top Layer w7: v1(540,4395) 540,4329 526.34,4315.34 526.34,4138.66 544,4121 567,4121 580.43,4134.43 V10.OVL7@580.43,4166.14 ; v1(628,4975) 636.27,4966.73 S5.DATA7@686.38,4966.73
  Mid-Layer 2 w7: v1(540,4395) 484,4451 484,4785 518.5,4819.5 518.5,4952 541.5,4975 v1(628,4975)
  Bottom Layer w7: v1(540,4395) 551.56,4395 582.02,4425.47 OB10.D7@582.02,4458.86
OB_D_B56: OB9.D0 S5.DATA8 V9.OVL0 | length 1875.8
  Top Layer w7: v1(49.5,4966.73) S5.DATA8@233.62,4966.73 v1(334,4966.73) ; V9.OVL0@385.16,4166.14 385.16,4103.84 v1(386,4103)
  Mid-Layer 2 w7: v1(49.5,4966.73) 49.5,4199.5 224,4025 368,4025 386,4043 v1(386,4103)
  Bottom Layer w7: OB9.D0@312.98,4691.14 312.98,4720 334,4741.02 v1(334,4966.73)
OB_D_B57: OB9.D1 S5.DATA9 V9.OVL1 | length 1226.8
  Top Layer w7: S5.DATA9@233.62,4935.24 v1(293,4935.24) ; v1(333.98,4103) V9.OVL1@333.98,4166.14
  Mid-Layer 2 w7: v1(293,4935.24) 332.76,4935.24 459.5,4808.5 v1(459.5,4396) ; v1(333.98,4103) 373,4142.02 v1(373,4396)
  Bottom Layer w7: OB9.D1@338.57,4458.86 338.57,4430.43 v1(373,4396) v1(459.5,4396)
OB_D_B58: OB9.D2 S5.DATA10 V9.OVL2 | length 1135
  Top Layer w7: v1(175,4903.74) S5.DATA10@233.62,4903.74 ; V9.OVL2@308.39,4166.14 308.39,4226 v1(316.39,4234)
  Mid-Layer 2 w7: v1(175,4903.74) 138.5,4867.24 138.5,4438.17 316.39,4260.29 v1(316.39,4234)
  Bottom Layer w7: OB9.D2@312.98,4458.86 312.98,4392 341,4363.98 341,4258.61 v1(316.39,4234)
OB_D_B59: OB9.D3 S5.DATA11 V9.OVL3 | length 1188.6
  Top Layer w7: S5.DATA11@233.62,4872.24 284.24,4872.24 v1(292,4880) ; v1(282.8,4103) V9.OVL3@282.8,4166.14
  Mid-Layer 2 w7: v1(292,4880) 386.5,4785.5 440,4777.5 440,4760.5 340,4660.5 340,4375 v1(311,4346)
  Bottom Layer w7: v1(282.8,4103) 287.39,4107.59 287.39,4369.61 ; OB9.D3@287.39,4458.86 287.39,4369.61 ; v1(311,4346) 287.39,4369.61
OB_D_B60: OB9.D4 S5.DATA12 V9.OVL4 | length 910
  Top Layer w7: v1(175,4778) 175.24,4777.76 S5.DATA12@233.62,4777.76 ; v1(257,4259) 257.2,4258.8 V9.OVL4@257.2,4166.14
  Mid-Layer 1 w7: v1(175,4778) 205,4748 205,4383 257,4331 v1(257,4259)
  Bottom Layer w7: v1(257,4259) 266,4268 266,4412.8 261.8,4417 OB9.D4@261.8,4458.86
OB_D_B61: OB9.D5 S5.DATA13 V9.OVL5 | length 1314.7
  Top Layer w7: V9.OVL5@231.61,4166.14 231.61,4103.39 v1(232,4103) ; S5.DATA13@233.62,4746.26 369.26,4746.26 v1(380,4757)
  Mid-Layer 2 w7: v1(232,4103) 345,4216 345,4268.48 263,4350.48 263,4640 ; v1(236.2,4396.3) 236.2,4613.2 263,4640 ; v1(380,4757) 263,4640
  Bottom Layer w7: v1(236.2,4396.3) OB9.D5@236.2,4458.86
OB_D_B62: OB9.D6 S5.DATA14 V9.OVL6 | length 1106.8
  Top Layer w7: v1(215,4229) 206.02,4220.02 V9.OVL6@206.02,4166.14 206.02,4136 184.02,4114 143,4114 118.5,4138.5 118.5,4674.5 158.76,4714.76 S5.DATA14@233.62,4714.76
  Bottom Layer w7: OB9.D6@210.61,4458.86 210.61,4420 206,4415.39 206,4238 v1(215,4229)
OB_D_B63: OB9.D7 S5.DATA15 V9.OVL7 | length 715.2
  Top Layer w7: v1(177,4346) v1@180.43,4342.57 ; V9.OVL7@180.43,4166.14 v1@180.43,4342.57 ; S5.DATA15@233.62,4683.27 199,4683.27 138.5,4622.77 138.5,4504.5 180.43,4462.57 v1@180.43,4342.57
  Bottom Layer w7: v1(177,4346) 185.02,4354.02 OB9.D7@185.02,4458.86
OB_D_B64: OB8.D0 S4.DATA0 V8.OVL0 | length 1356.6
  Top Layer w7: V8.OVL0@3884.84,1308.86 3884.84,1254.85 3870,1240.01 3870,800.73 3899,771.73 S4.DATA0@3973.62,771.73 4121.27,771.73 v1(4177.27,715.73)
  Bottom Layer w7: OB8.D0@3961.02,783.86 3961.02,632 3977.02,616 4101,616 4123,594 4167.5,594 4177.27,603.77 v1(4177.27,715.73)
OB_D_B65: OB8.D1 S4.DATA1 V8.OVL1 | length 1119.3
  Top Layer w7: v1(3932,1105) 3932,1262.98 3936.02,1267 V8.OVL1@3936.02,1308.86 3936.02,1336.98 3920,1353 3866,1353 3852,1339 3852,776.84 3874.84,754 3933.24,754 3947,740.24 S4.DATA1@3973.62,740.24
  Bottom Layer w7: v1(3932,1105) 3935.43,1101.57 OB8.D1@3935.43,1016.14
OB_D_B66: OB8.D2 S4.DATA2 V8.OVL2 | length 899.1
  Top Layer w7: v1(3915,725) 3931.26,708.74 S4.DATA2@3973.62,708.74 ; V8.OVL2@3961.61,1308.86 3961.61,1246.39 v1(3962,1246)
  Mid-Layer 2 w7: v1(3915,725) 3962,772 v1(3962,1246)
  Bottom Layer w7: OB8.D2@3961.02,1016.14 3961.02,1245.02 v1(3962,1246)
OB_D_B67: OB8.D3 S4.DATA3 V8.OVL3 | length 847
  Top Layer w7: S4.DATA3@3973.62,677.24 4030.24,677.24 v1(4033,680) ; V8.OVL3@3987.2,1308.86 3991,1267.2 v1(3991,1148.61)
  Mid-Layer 2 w7: v1(3991,1148.61) 3998,1141.61 3998,715 v1(4033,680)
  Bottom Layer w7: OB8.D3@3986.61,1016.14 3986.61,1067.23 3998,1078.61 3998,1141.61 v1(3991,1148.61)
OB_D_B68: OB8.D4 S4.DATA4 V8.OVL4 | length 1389
  Top Layer w7: v1(3902.26,567) 3918.01,582.76 S4.DATA4@3973.62,582.76 ; V8.OVL4@4012.8,1308.86 4012.8,1228.2 v1(4020,1221)
  Mid-Layer 2 w7: v1(3902.26,567) 3931.26,596 4104,596 4160,586.5 4182,608.5 4182,643 4205.77,666.77 4205.77,854.23 4187.5,872.5 4187.5,985.5 4090.39,1082.61 4081.2,1082.61 4020,1143.81 v1(4020,1221)
  Bottom Layer w7: OB8.D4@4012.2,1016.14 4012.2,1050.11 4027,1064.91 4027,1214 v1(4020,1221)
OB_D_B69: OB8.D5 S4.DATA5 V8.OVL5 | length 1297.3
  Top Layer w7: S4.DATA5@3973.62,551.26 4017.26,551.26 v1(4033,567) ; V8.OVL5@4038.39,1308.86 4038.39,1360.39 v1(4049,1371)
  Mid-Layer 2 w7: v1(4033,567) 4190.86,567 4199.5,575.64 4199.5,626.5 4222.77,649.77 4222.77,871.23 4204.5,889.5 4204.5,999.61 v1(4093,1111.11) 4093,1327 v1(4049,1371)
  Bottom Layer w7: OB8.D5@4037.8,1016.14 4037.8,1047.91 4093,1103.11 v1(4093,1111.11)
OB_D_B70: OB8.D6 S4.DATA6 V8.OVL6 | length 2079.3
  Top Layer w7: S4.DATA6@3973.62,519.76 3872,519.76 3831.93,559.83 3831.93,1359.93 3873,1401 4061,1401 4079,1383 4079,1360.7 4063.98,1345.67 V8.OVL6@4063.98,1308.86 v1(4064,1246)
  Bottom Layer w7: OB8.D6@4063.39,1016.14 4063.39,988.39 4052,977 4049.58,977 4047.66,975.08 3921.88,975.08 3865.93,1031.02 3865.93,1264.93 3881,1280 4030,1280 v1(4064,1246)
OB_D_B71: OB8.D7 S4.DATA7 V8.OVL7 | length 1423.3
  Top Layer w7: S4.DATA7@3973.62,488.27 4008.27,488.27 v1(4032,512) ; V8.OVL7@4089.57,1308.86 4089.57,1347.22 4100.35,1358 4157,1358 4167.66,1347.34 4167.66,1166.66 v1(4143.66,1142.66)
  Mid-Layer 2 w7: v1(4032,512) 4177.5,512 4216.5,551 4216.5,609.5 4239.77,632.77 4239.77,867.77 4269,897 4269,1017.32 v1(4143.66,1142.66)
  Bottom Layer w7: OB8.D7@4088.98,1016.14 4088.98,1055.98 4143.66,1110.66 v1(4143.66,1142.66)
OB_D_B72: OB7.D0 S4.DATA8 V7.OVL0 | length 1177.6
  Top Layer w7: v1(4271.16,488.27) S4.DATA8@4426.38,488.27 ; V7.OVL0@4284.84,1308.86 4284.84,1280 4262.76,1280 4225,1242.24 4225,1019 4293,951 v1(4293,843)
  Mid-Layer 2 w7: v1(4271.16,488.27) 4251,508.43 4251,583 4293,625 v1(4293,843)
  Bottom Layer w7: v1(4293,843) 4332,843 4361.02,813.98 OB7.D0@4361.02,783.86
OB_D_B73: OB7.D1 S4.DATA9 V7.OVL1 | length 1319.3
  Top Layer w7: v1(4220,511.76) 4228,519.76 S4.DATA9@4426.38,519.76 ; V7.OVL1@4336.02,1308.86 v1(4336.02,1379)
  Mid-Layer 2 w7: v1(4220,511.76) 4233.5,525.26 4233.5,592.5 4256.77,615.77 4256.77,857.57 4287,887.81 4287,939 4327.43,979.43 v1(4327.43,1137.02) 4327.43,1370.41 v1(4336.02,1379)
  Bottom Layer w7: v1(4327.43,1137.02) 4327.43,1129.02 4335.43,1121.02 OB7.D1@4335.43,1016.14
OB_D_B74: OB7.D2 S4.DATA10 V7.OVL2 | length 1322.8
  Top Layer w7: V7.OVL2@4361.61,1308.86 4361.61,1256.39 v1(4372,1246) ; S4.DATA10@4426.38,551.26 4476.74,551.26 v1(4485,543)
  Mid-Layer 2 w7: v1(4372,1246) 4357,1231 4357,973 4322,938 4322,627 4288,593 4288,537.5 4304,521.5 4463.5,521.5 v1(4485,543)
  Bottom Layer w7: OB7.D2@4361.02,1016.14 4361.02,1055 4357,1059.02 4357,1231 v1(4372,1246)
OB_D_B75: OB7.D3 S4.DATA11 V7.OVL3 | length 1160.4
  Top Layer w7: v1(4320,558) 4344.76,582.76 S4.DATA11@4426.38,582.76 ; V7.OVL3@4387.2,1308.86 v1(4387.2,1404)
  Mid-Layer 2 w7: v1(4320,558) 4386.61,624.61 v1(4386.61,1078.7) 4386.61,1217.61 4402,1233 4402,1389.2 v1(4387.2,1404)
  Bottom Layer w7: OB7.D3@4386.61,1016.14 v1(4386.61,1078.7)
OB_D_B76: OB7.D4 S4.DATA12 V7.OVL4 | length 1580.8
  Top Layer w7: V7.OVL4@4412.8,1308.86 4412.8,1215.2 v1(4432,1196) ; S4.DATA12@4426.38,677.24 4469.24,677.24 v1(4489,697)
  Mid-Layer 1 w7: v1(4432,1196) 4418.77,1182.77 4281.31,1182.77 4118,1019.46 4095.46,1019.46 3996.12,920.12 3996.12,808 4024.12,780 4406,780 v1(4489,697)
  Bottom Layer w7: OB7.D4@4412.2,1016.14 4412.2,1054 4416,1057.8 4416,1180 v1(4432,1196)
OB_D_B77: OB7.D5 S4.DATA13 V7.OVL5 | length 1234.7
  Top Layer w7: S4.DATA13@4426.38,708.74 4456.48,708.74 4500.87,753.13 v1(4602,753.13) ; V7.OVL5@4438.39,1308.86 4438.39,1359.39 v1(4451,1372)
  Mid-Layer 2 w7: v1(4445.8,1121.02) v1@4454.61,1121 ; v1(4451,1372) 4451,1217.5 4482,1186.5 4482,1139 4464,1121 v1@4454.61,1121 ; v1(4602,753.13) 4602,1016 4505.79,1112.21 4454.61,1112.21 v1@4454.61,1121
  Bottom Layer w7: v1@4454.61,1121 v1(4445.8,1121.02) ; v1(4445.8,1121.02) OB7.D5@4437.8,1016.14 4437.8,1116 4442.82,1121.02 v1(4445.8,1121.02)
OB_D_B78: OB7.D6 S4.DATA14 V7.OVL6 | length 1581.5
  Top Layer w7: S4.DATA14@4426.38,740.24 4400,740.24 4384,756.24 4384,892 4244,1032 4244,1154 4257,1167 4454.98,1167 4463.98,1176 4463.98,1262 ; V7.OVL6@4463.98,1308.86 4463.98,1262 ; v1(4479.98,1246) 4463.98,1262
  Bottom Layer w7: OB7.D6@4463.39,1016.14 4463.39,988 4434.39,959 4342.05,959 4306,995.05 4306,1093.46 4287,1112.46 4287,1145.59 4318,1176.59 4318,1268 4336,1286 4439.98,1286 v1(4479.98,1246)
OB_D_B79: OB7.D7 S4.DATA15 V7.OVL7 | length 1382.1
  Top Layer w7: S4.DATA15@4426.38,771.73 4458.03,771.73 4609,922.71 v1(4609,1120) ; V7.OVL7@4489.57,1308.86 4489.57,1397.57 v1(4506,1414)
  Mid-Layer 2 w7: v1(4609,1120) 4567.66,1161.34 4567.66,1250.34 ; v1(4609.99,1208.01) 4567.66,1250.34 ; 4567.66,1250.34 4506,1312 v1(4506,1414) 4567.66,1352.34 4567.66,1250.34
  Bottom Layer w7: OB7.D7@4488.98,1016.14 4488.98,1087 v1(4609.99,1208.01)
OB_D_B80: OB6.D0 S3.DATA0 V6.OVL0 | length 1562.3
  Top Layer w7: V6.OVL0@4684.84,1308.86 4684.84,1370.49 4715.35,1401 4938.16,1401 4981.16,1358 5002,1358 5013,1347 5013,824.5 5009.2,824.5 4992.5,807.81 4992.5,784.2 4992.85,783.85 4957,748 v1(4957,689) 4953,689 4870.27,771.73 S3.DATA0@4788.62,771.73
  Bottom Layer w7: OB6.D0@4762.02,783.86 4762.02,754.98 4799,718 4854.3,718 4867.3,705 4937,705 4953,689 v1(4957,689)
OB_D_B81: OB6.D1 S3.DATA1 V6.OVL1 | length 770.4
  Top Layer w7: v1(4716.5,830.72) 4716.5,773.5 4749.76,740.24 S3.DATA1@4788.62,740.24 ; V6.OVL1@4736.02,1308.86 4736.02,1164.98 4752.43,1148.57 v1(4752.43,1137.02)
  Mid-Layer 2 w7: v1(4716.5,830.72) 4716.5,832.5 4752.43,868.43 v1(4752.43,1137.02)
  Bottom Layer w7: OB6.D1@4736.43,1016.14 4736.43,1121.02 v1(4752.43,1137.02)
OB_D_B82: OB6.D2 S3.DATA2 V6.OVL2 | length 1100.6
  Top Layer w7: v1(4701,738) 4730.26,708.74 S3.DATA2@4788.62,708.74 ; V6.OVL2@4761.61,1308.86 4761.61,1201.61 v1(4785.61,1177.61)
  Mid-Layer 2 w7: v1(4701,738) 4676.5,762.5 4676.5,806.37 4671,811.87 4671,849.56 4676.5,855.06 4676.5,1113.5 4740.61,1177.61 v1(4785.61,1177.61)
  Bottom Layer w7: OB6.D2@4762.02,1016.14 4762.02,988 4749.11,975.08 4726.97,975.08 4708,994.05 4708,1138.77 4746.85,1177.61 v1(4785.61,1177.61)
OB_D_B83: OB6.D3 S3.DATA3 V6.OVL3 | length 864.3
  Top Layer w7: V6.OVL3@4787.2,1308.86 4787.2,1218.8 4816,1190 4816,1123.09 v1(4787.61,1094.7) ; S3.DATA3@4788.62,677.24 4839.76,677.24 v1(4848,669)
  Mid-Layer 2 w7: v1(4787.61,1094.7) 4889.5,992.82 4889.5,909.2 4876,895.7 4876,697 v1(4848,669)
  Bottom Layer w7: OB6.D3@4787.61,1016.14 v1(4787.61,1094.7)
OB_D_B84: OB6.D4 S3.DATA4 V6.OVL4 | length 1246.1
  Top Layer w7: v1(4712,605) 4734.24,582.76 S3.DATA4@4788.62,582.76 ; V6.OVL4@4812.8,1308.86 4812.8,1240.2 ; v1(4849,1204) 4812.8,1240.2 ; v1(4944.8,1105) 4848.56,1203.57 4812.8,1240.2
  Mid-Layer 1 w7: v1(4712,605) 4729,605 4996,872 4996,1053.8 v1(4944.8,1105)
  Bottom Layer w7: OB6.D4@4813.2,1016.14 4813.2,1054 4818,1058.8 4818,1173 v1(4849,1204)
OB_D_B85: OB6.D5 S3.DATA5 V6.OVL5 | length 1159.2
  Top Layer w7: S3.DATA5@4788.62,551.26 4832.26,551.26 v1(4848,567) ; v1(4838,1372) 4838.39,1371.61 V6.OVL5@4838.39,1308.86
  Mid-Layer 2 w7: v1(4838,1372) 4819,1353 4819,1148.82 v1(4854.8,1113.02) 4854.8,1071.2 4965,961 4965,784.97 4911,730.97 4911,648 4848,585 v1(4848,567)
  Bottom Layer w7: OB6.D5@4838.8,1016.14 4838.8,1105.02 4846.8,1113.02 v1(4854.8,1113.02)
OB_D_B86: OB6.D6 S3.DATA6 V6.OVL6 | length 1739.1
  Top Layer w7: S3.DATA6@4788.62,519.76 4987.76,519.76 v1(4988,520) ; V6.OVL6@4863.98,1308.86 4863.98,1262 v1(4879.98,1246)
  Mid-Layer 2 w7: v1(4879.98,1246) 4971,1246 5000,1217 5000,987 4988,975 v1(4988,520)
  Bottom Layer w7: OB6.D6@4864.39,1016.14 4864.39,987.99 4843.61,967.22 4765.28,967.22 4756.15,958.08 4716.7,958.08 4690,984.78 4690,1176 4760,1246 v1(4879.98,1246)
OB_D_B87: OB6.D7 S3.DATA7 V6.OVL7 | length 1518.5
  Top Layer w7: S3.DATA7@4788.62,488.27 4847.73,488.27 v1(4848,488) ; V6.OVL7@4889.57,1308.86 4889.57,1347.57 4907,1365 4950.12,1365 4979,1336.12 4979,1080 4963,1064 4912.68,1064 v1(4897.98,1078.7)
  Mid-Layer 1 w7: v1(4848,488) 4957,597 4957,637 4914,680 4914,751 5013,850 5013,1113 4991,1135 4920.98,1135 4897.98,1112 v1(4897.98,1078.7)
  Bottom Layer w7: OB6.D7@4889.98,1016.14 4889.98,1070.7 v1(4897.98,1078.7)
OB_D_B88: OB5.D0 S3.DATA8 V5.OVL0 | length 1661.2
  Top Layer w7: v1(5042,454) 5181.73,454 5216,488.27 S3.DATA8@5241.38,488.27 ; V5.OVL0@5084.84,1308.86 5084.84,1349.16 ; 5084.84,1349.16 5084.84,1384 5060.84,1408 v1(5026,1408) 5084.84,1349.16
  Mid-Layer 2 w7: v1(5026,1408) 5017.81,1399.81 v1@5017.81,799.19 ; v1(5042,454) 5017.81,478.19 v1@5017.81,799.19 ; v1(5110,710) 5079.5,740.5 5079.5,763.81 5047.31,796 v1(5021,796) v1@5017.81,799.19
  Bottom Layer w7: v1(5110,710) 5154.02,754.02 OB5.D0@5154.02,783.86 OB5.D0@5154.02,802
OB_D_B89: OB5.D1 S3.DATA9 V5.OVL1 | length 1313.4
  Top Layer w7: v1(5123,1370) 5136.02,1356.98 V5.OVL1@5136.02,1308.86 ; v1(5166,483) 5202.76,519.76 S3.DATA9@5241.38,519.76
  Mid-Layer 1 w7: v1(5136.43,1121.02) 5093.11,1077.7 5072,1077.7 5044.01,1049.71 5044.01,1044.6 5030,1030.59 5030,846.61 5093.5,783.11 5093.5,734.5 5051,692 5051,648.5 5064,635.5 5074,635.5 5094,615.5 5094,555 v1(5166,483)
  Mid-Layer 2 w7: v1(5123,1370) 5121,1368 5121,1136.46 v1(5136.43,1121.02)
  Bottom Layer w7: OB5.D1@5128.43,1016.14 5128.43,1113.02 v1(5136.43,1121.02)
OB_D_B90: OB5.D2 S3.DATA10 V5.OVL2 | length 1018.3
  Top Layer w7: v1(5151,1230) 5161.61,1240.61 V5.OVL2@5161.61,1308.86 ; S3.DATA10@5241.38,551.26 v1(5315.74,551.26)
  Mid-Layer 1 w7: v1(5118,950) 5136.5,968.5 5200.97,968.5 5230,939.47 5230,637 v1(5315.74,551.26)
  Bottom Layer w7: v1(5118,950) 5154.02,986.02 OB5.D2@5154.02,1016.14 5154.02,1095.55 5165,1106.52 5165,1216 v1(5151,1230)
OB_D_B91: OB5.D3 S3.DATA11 V5.OVL3 | length 974.4
  Top Layer w7: v1(5174,541) 5215.76,582.76 S3.DATA11@5241.38,582.76 ; V5.OVL3@5187.2,1308.86 5187.2,1238.2 5179.61,1230.61 5179.61,1094.7 v1(5195.61,1078.7)
  Mid-Layer 2 w7: v1(5174,541) 5234,601 5234,1040.32 v1(5195.61,1078.7)
  Bottom Layer w7: OB5.D3@5179.61,1016.14 5179.61,1066.32 5192,1078.7 v1(5195.61,1078.7)
OB_D_B92: OB5.D4 S3.DATA12 V5.OVL4 | length 941.2
  Top Layer w7: v1(5212.8,1208) V5.OVL4@5212.8,1308.86 ; S3.DATA12@5241.38,677.24 5284,677.24 v1(5324,717.24)
  Mid-Layer 2 w7: v1(5212.8,1208) 5253,1167.8 5253,788.24 v1(5324,717.24)
  Bottom Layer w7: OB5.D4@5205.2,1016.14 5205.2,1044 5224.11,1062.91 5224.11,1196.68 v1(5212.8,1208)
OB_D_B93: OB5.D5 S3.DATA13 V5.OVL5 | length 1262.3
  Top Layer w7: v1(5170,721) 5177.24,721 5189.5,708.74 S3.DATA13@5241.38,708.74 ; v1(5200,1371) 5219.39,1371 5238.39,1352 V5.OVL5@5238.39,1308.86
  Mid-Layer 2 w7: v1(5170,721) 5213,764 5213,951 5150,1014 5150,1077.59 5183,1110.59 5183,1354 v1(5200,1371)
  Bottom Layer w7: v1(5200,1371) 5248,1323 5248,1183 5242,1177 5242,1052.28 5230.8,1041.08 OB5.D5@5230.8,1016.14
OB_D_B94: OB5.D6 S3.DATA14 V5.OVL6 | length 887.4
  Top Layer w7: S3.DATA14@5241.38,740.24 5271.5,740.24 5284.26,753 5324.76,753 5393.5,821.74 5393.5,1052.61 v1(5329,1117.11) 5263.98,1182.14 V5.OVL6@5263.98,1308.86
  Bottom Layer w7: OB5.D6@5256.39,1016.14 5256.39,1016.2 5258.11,1016.2 5259,1017.09 5259,1096.11 5280,1117.11 v1(5329,1117.11)
OB_D_B95: OB5.D7 S3.DATA15 V5.OVL7 | length 872.1
  Top Layer w7: S3.DATA15@5241.38,771.73 5294.12,771.73 5376.5,854.12 5376.5,941.71 5289.98,1028.24 v1(5289.98,1078.7) ; V5.OVL7@5289.57,1308.86 v1(5289.57,1373.23)
  Mid-Layer 2 w7: v1(5289.57,1373.23) 5281.98,1365.64 5281.98,1086.7 v1(5289.98,1078.7)
  Bottom Layer w7: OB5.D7@5281.98,1016.14 v1@5281.98,1072.68 ; v1@5281.98,1072.68 v1(5289.98,1078.7) 5288,1078.7 v1@5281.98,1072.68
OB_D_B96: OB4.D0 S2.DATA0 V4.OVL0 | length 1162.1
  Top Layer w7: v1(740,1315.31) 771.73,1347.04 S2.DATA0@771.73,1501.38 771.73,1576 807.73,1612 1144,1612 1170.84,1585.16 V4.OVL0@1308.86,1585.16
  Bottom Layer w7: v1(740,1315.31) 819.31,1315.31 841,1337 841,1485 817.02,1508.98 OB4.D0@783.86,1508.98
OB_D_B97: OB4.D1 S2.DATA1 V4.OVL1 | length 1468.9
  Top Layer w7: S2.DATA1@740.24,1501.38 740.24,1608 806.24,1674 1480.5,1674 1491,1663.5 1491,1600.98 1424,1533.98 V4.OVL1@1308.86,1533.98 1255.11,1533.98 v1(1237.09,1552)
  Bottom Layer w7: OB4.D1@1016.14,1534.57 1036.92,1534.57 1054.35,1552 v1(1237.09,1552)
OB_D_B98: OB4.D2 S2.DATA2 V4.OVL2 | length 1358.4
  Top Layer w7: v1(638,1426) 638,1435 652,1449 680.7,1449 707.7,1476 708.74,1476 S2.DATA2@708.74,1501.38 ; V4.OVL2@1308.86,1508.39 1355.61,1508.39 v1(1372,1492)
  Mid-Layer 1 w7: v1(638,1426) 638,1435 698,1495 1149.3,1495 1168.3,1476 1356,1476 v1(1372,1492)
  Bottom Layer w7: OB4.D2@1016.14,1508.98 1050.98,1508.98 1076.5,1534.5 1211.5,1534.5 1254,1492 v1(1372,1492)
OB_D_B99: OB4.D3 S2.DATA3 V4.OVL3 | length 903.4
  Top Layer w7: S2.DATA3@677.24,1501.38 v1(677.24,1560) ; v1(1188,1506) 1204,1506 1227.2,1482.8 V4.OVL3@1308.86,1482.8
  Mid-Layer 1 w7: v1(677.24,1560) 724.24,1513 1181,1513 v1(1188,1506)
  Bottom Layer w7: OB4.D3@1016.14,1483.39 1063.43,1483.39 1086.04,1506 v1(1188,1506)
OB_D_B100: OB4.D4 S2.DATA4 V4.OVL4 | length 960
  Top Layer w7: v1(567,1442) 582.76,1457.76 S2.DATA4@582.76,1501.38 ; v1(1113.02,1465.8) 1266.2,1465.8 1274.8,1457.2 V4.OVL4@1308.86,1457.2
  Mid-Layer 1 w7: v1(567,1442) 611.5,1397.5 715,1397.5 729.5,1412 906,1412 959.8,1465.8 v1(1113.02,1465.8)
  Bottom Layer w7: OB4.D4@1016.14,1457.8 1108,1457.8 1113.02,1462.82 v1(1113.02,1465.8)
OB_D_B101: OB4.D5 S2.DATA5 V4.OVL5 | length 1003.5
  Top Layer w7: S2.DATA5@551.26,1501.38 v1(551.26,1577) ; v1(1246,1435.11) 1249.5,1431.61 V4.OVL5@1308.86,1431.61
  Bottom Layer w7: v1(551.26,1577) 578.76,1604.5 960.5,1604.5 968,1597 968,1452.2 988,1432.2 OB4.D5@1016.14,1432.2 1047.29,1432.2 1050.2,1435.11 v1(1246,1435.11)
OB_D_B102: OB4.D6 S2.DATA6 V4.OVL6 | length 1212.5
  Top Layer w7: v1(508,1386) 519.76,1397.76 S2.DATA6@519.76,1501.38 ; V4.OVL6@1308.86,1406.02 1360.98,1406.02 v1(1372,1395)
  Mid-Layer 1 w7: v1(508,1386) 609,1285 958,1285 v1(1079,1406)
  Bottom Layer w7: OB4.D6@1016.14,1406.61 v1@1078.39,1406.61 ; v1(1079,1406) v1@1078.39,1406.61 ; v1(1372,1395) 1360.39,1406.61 v1@1078.39,1406.61
OB_D_B103: OB4.D7 S2.DATA7 V4.OVL7 | length 1021.3
  Top Layer w7: S2.DATA7@488.27,1501.38 v1(488.27,1560) ; v1(1196.57,1373) 1204,1380.43 V4.OVL7@1308.86,1380.43
  Mid-Layer 1 w7: v1(488.27,1560) 488.27,1455.73 563.5,1380.5 v1(910.5,1380.5)
  Bottom Layer w7: v1(910.5,1380.5) 911.02,1381.02 OB4.D7@1016.14,1381.02 1047,1381.02 1055.02,1373 v1(1196.57,1373)
OB_D_B104: OB3.D0 S2.DATA8 V3.OVL0 | length 958.4
  Top Layer w7: S2.DATA8@488.27,1048.62 488.27,1084.27 v1(512.27,1108.27) ; v1(1204,1230) 1248.84,1185.16 V3.OVL0@1308.86,1185.16
  Bottom Layer w7: v1(512.27,1108.27) 541,1137 723,1137 751.02,1108.98 OB3.D0@783.86,1108.98 817.98,1108.98 846,1137 913,1137 1006,1230 v1(1204,1230)
OB_D_B105: OB3.D1 S2.DATA9 V3.OVL1 | length 1303.4
  Top Layer w7: v1(474,1201) 542,1133 542,1097.24 519.76,1075 S2.DATA9@519.76,1048.62 ; v1(1196,1149.98) 1212,1133.98 V3.OVL1@1308.86,1133.98
  Mid-Layer 1 w7: v1(474,1201) 540.66,1267.66 1078.32,1267.66 v1(1196,1149.98)
  Bottom Layer w7: OB3.D1@1016.14,1134.57 1039.57,1134.57 1066.5,1161.5 1184.48,1161.5 v1(1196,1149.98)
OB_D_B106: OB3.D2 S2.DATA10 V3.OVL2 | length 1125.7
  Top Layer w7: S2.DATA10@551.26,1048.62 551.26,1082.24 575,1105.98 v1(575,1107) ; V3.OVL2@1308.86,1108.39 1367.39,1108.39 v1(1372,1113)
  Mid-Layer 1 w7: v1(575,1107) 575,1125 608,1158 777,1158 795,1140 1088,1140 v1(1095,1133)
  Bottom Layer w7: OB3.D2@1016.14,1108.98 1070.98,1108.98 ; v1(1095,1133) 1070.98,1108.98 ; v1(1372,1113) 1321,1062 1182.98,1062 1136,1108.98 1070.98,1108.98
OB_D_B107: OB3.D3 S2.DATA11 V3.OVL3 | length 1416.5
  Top Layer w7: v1(559,990) 582.76,1013.76 S2.DATA11@582.76,1048.62 ; v1(1208,1091) 1216.2,1082.8 V3.OVL3@1308.86,1082.8
  Mid-Layer 1 w7: v1(559,990) 604,1035 604,1121 624,1141 758,1141 822,1077 1083.23,1077 1097.23,1091 v1(1208,1091)
  Bottom Layer w7: OB3.D3@1016.14,1083.39 991.21,1083.39 975,1099.59 975,1143.95 1009.55,1178.5 1212.5,1178.5 1232,1159 1232,1115 v1(1208,1091)
OB_D_B108: OB3.D4 S2.DATA12 V3.OVL4 | length 1072.1
  Top Layer w7: v1(669,1107) 677.24,1098.76 S2.DATA12@677.24,1048.62 ; V3.OVL4@1308.86,1057.2 v1(1422,1057.2)
  Mid-Layer 1 w7: v1(669,1107) 718.2,1057.8 v1(1137.02,1057.8) 1140.23,1061 1418.2,1061 v1(1422,1057.2)
  Bottom Layer w7: OB3.D4@1016.14,1057.8 v1(1137.02,1057.8)
OB_D_B109: OB3.D5 S2.DATA13 V3.OVL5 | length 1018.7
  Top Layer w7: v1(661.71,990) 683.21,1011.5 695.2,1011.5 703.05,1019.35 703.05,1042.93 S2.DATA13@708.74,1048.62 ; v1(1246,1032) 1246.39,1031.61 V3.OVL5@1308.86,1031.61
  Mid-Layer 1 w7: v1(661.71,990) 707.71,1036 1106.02,1036 1113.02,1029 1243,1029 v1(1246,1032)
  Bottom Layer w7: OB3.D5@1016.14,1032.2 1089.61,1032.2 ; v1(1246,1032) 1235.3,1021.3 1120.93,1021.3 1112.73,1029.5 ; 1089.61,1032.2 1110.02,1032.2 1112.73,1029.5 ; 1089.61,1032.2 1092.32,1029.5 1112.73,1029.5
OB_D_B110: OB3.D6 S2.DATA14 V3.OVL6 | length 882.2
  Top Layer w7: v1(714,990) 740.24,1016.24 S2.DATA14@740.24,1048.62 ; V3.OVL6@1308.86,1006.02 1366.98,1006.02 v1(1372,1001)
  Mid-Layer 1 w7: v1(714,990) 742.5,1018.5 949.5,1018.5 967,1001 v1(1084.23,1001) v1(1372,1001)
  Bottom Layer w7: OB3.D6@1016.14,1006.61 1078.61,1006.61 v1(1084.23,1001)